# EAGLE board Meter_PCB_V1 (EAGLE 9.0.0)
REV: B
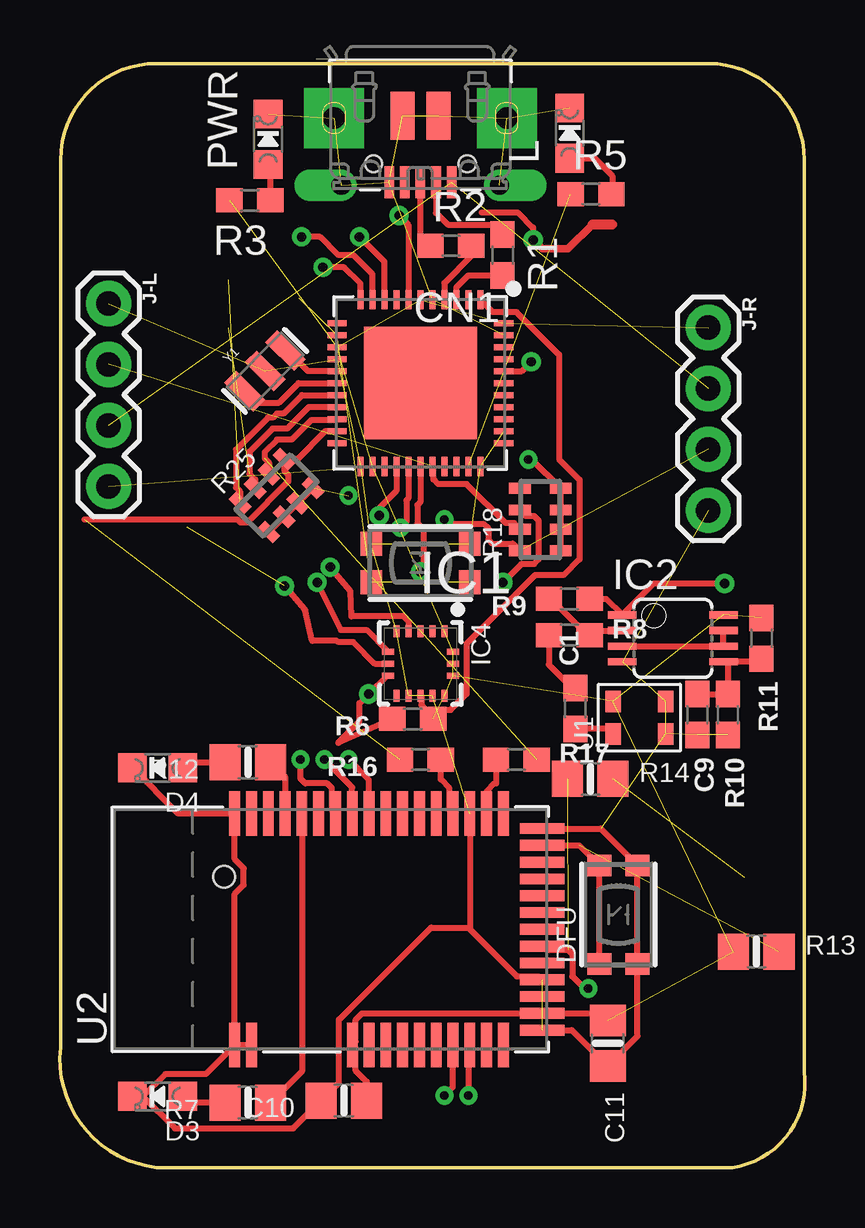
[diagram p0: board, top side]
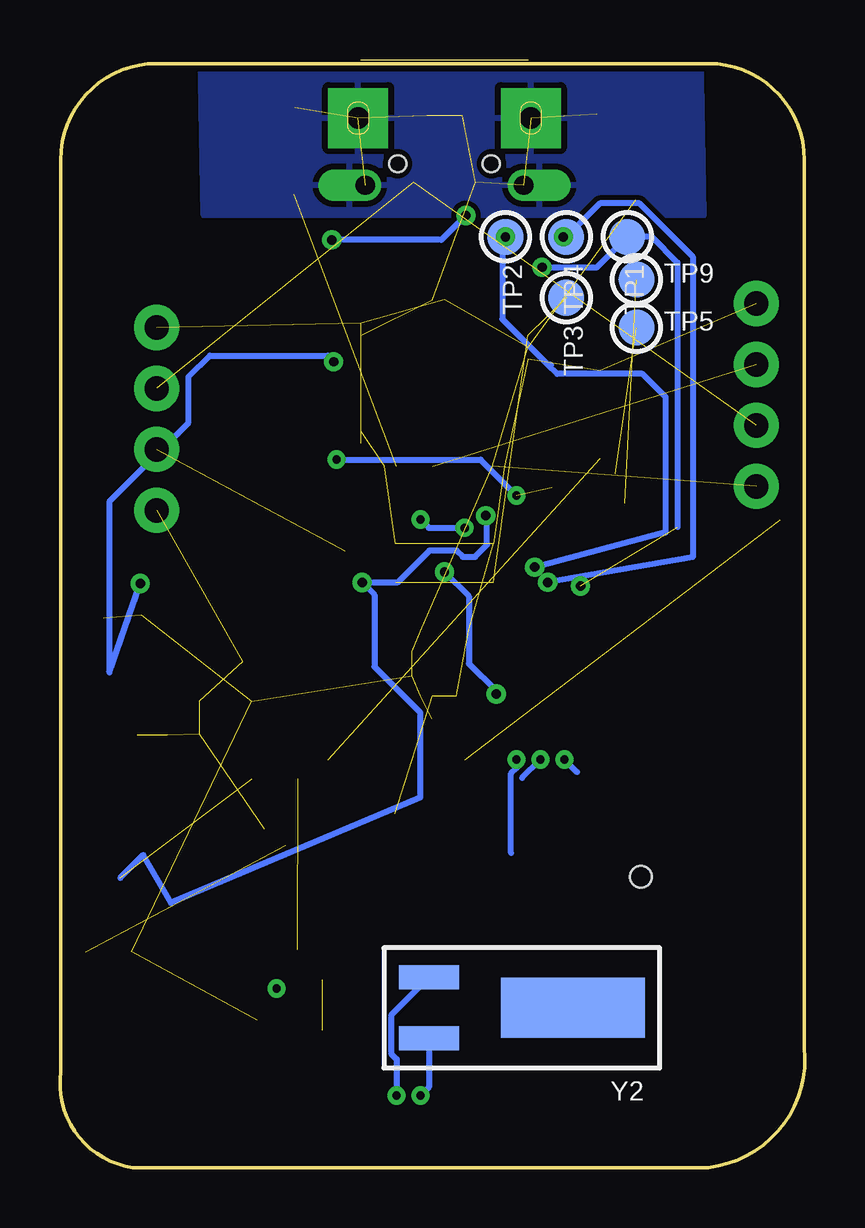
[diagram p1: board, bottom side, seen from below]

Size 31.06 x 46.15 mm. Coordinates in mm from the lower left corner, seen from the top.
Outline: 11.53,46.15 18.52,46.15
Outline: 0.03,5 0.03,42 arc-90 4.03,46 27.03,46 arc-90 31.03,42 31.03,4 arc-90 28.03,0 4.03,0 arc-90 0.03,5
Copper layers (1*16): Top 0.035mm / dielectric 1.5mm / Bottom 0.035mm
Design rules "adafruit *": minimum track width 8mil, minimum drill 15.5mil, track to track 8mil, track to pad 8mil, pad to pad 8mil, via to via 8mil, smd to smd 8mil, copper to edge 10mil, drill to drill 8mil, minimum pad ring 10mil, minimum via ring 8mil, stop-mask expansion 2mil, vias tented up to drill 20mil, thermal gap 10mil

## Footprints (pad centres in the part's own frame; a part is rotated, then mirrored left to right if it is on the bottom)
0603-NO = smd 1.1 x 1: 1 -0.85,0; 2 0.85,0
0805-NO = smd 1.3 x 1.5: 1 -0.95,0; 2 0.95,0
4UCONN_20329_V2 = smd 1 x 2: BASE@1 -0.75,-2; BASE@2 0.75,-2 | smd 0.4 x 1.35: D+ 0,0.775; D- -0.65,0.775; GND 1.3,0.775; ID 0.65,0.775; VBUS -1.3,0.775 | drill 0.8 pad 1.2 offset: SPRT@1 -3.3,0.9; SPRT@2 3.3,0.9 | drill 0.9 pad 2.5 square: SPRT@3 -3.6,-1.9; SPRT@4 3.6,-1.9 | hole 0.7: -1.95,0; 1.95,0
CHIPLED_0805_NOOUTLINE = smd 1.2 x 1.2: A 0,-1.05; C 0,1.05
BTN_KMR2_4.6X2.8 = smd 0.9 x 1: A 2.05,0.8; A' -2.05,0.8; B 2.05,-0.8; B' -2.05,-0.8
TQFN44_7MM = smd 0.25 x 0.8: 1 -2.5,-3.475; 2 -2,-3.475; 3 -1.5,-3.475; 4 -1,-3.475; 5 -0.5,-3.475; 6 0,-3.475; 7 0.5,-3.475; 8 1,-3.475; 9 1.5,-3.475; 10 2,-3.475; 11 2.5,-3.475; 23 2.5,3.475; 24 2,3.475; 25 1.5,3.475; 26 1,3.475; 27 0.5,3.475; 28 0,3.475; 29 -0.5,3.475; 30 -1,3.475; 31 -1.5,3.475; 32 -2,3.475; 33 -2.5,3.475 | smd 0.8 x 0.25: 12 3.475,-2.5; 13 3.475,-2; 14 3.475,-1.5; 15 3.475,-1; 16 3.475,-0.5; 17 3.475,0; 18 3.475,0.5; 19 3.475,1; 20 3.475,1.5; 21 3.475,2; 22 3.475,2.5; 34 -3.475,2.5; 35 -3.475,2; 36 -3.475,1.5; 37 -3.475,1; 38 -3.475,0.5; 39 -3.475,0; 40 -3.475,-0.5; 41 -3.475,-1; 42 -3.475,-1.5; 43 -3.475,-2; 44 -3.475,-2.5 | smd 4.7 x 4.7: THERMAL 0,0
MSOP08 = smd 0.3 x 1.2: 1 -0.976,-2.113; 2 -0.326,-2.113; 3 0.324,-2.113; 4 0.974,-2.113; 5 0.974,2.112; 6 0.324,2.112; 7 -0.326,2.112; 8 -0.976,2.112
LGA16_3X3MM = smd 0.5 x 0.25: 1 -1.35,1; 2 -1.35,0.5; 3 -1.35,0; 4 -1.35,-0.5; 5 -1.35,-1; 9 1.35,-1; 10 1.35,-0.5; 11 1.35,0; 12 1.35,0.5; 13 1.35,1 | smd 0.25 x 0.5: 6 -0.5,-1.35; 7 0,-1.35; 8 0.5,-1.35; 14 0.5,1.35; 15 0,1.35; 16 -0.5,1.35
1X01 = drill 1.016 pad 1.88: 1 0,0
1X04 = drill 1.016 pad 1.88: 1 0,0; 2 2.54,0; 3 5.08,0; 4 7.62,0
RESPACK_4X0603_NO = smd 0.45 x 0.9: 1 -1.3,-0.85; 2 -0.4,-0.85; 3 0.4,-0.85; 4 1.3,-0.85; 5 1.3,0.85; 6 0.4,0.85; 7 -0.4,0.85; 8 -1.3,0.85
TESTPOINT_ROUND_1.5MM = smd 1.5 x 1.5: P$1 0,0
SPW2430HR5H-B = smd 0.9 x 0.66: 1 -0.675,1.095; 2 -0.675,-1.095; 3 0.675,-1.095; 4 0.675,1.095
BLE_MODULE_RAYTAC_MDBT40 = smd 1.85 x 0.45: 1 -4.825,4; 2 -4.825,3.3; 3 -4.825,-0.9; 4 -4.825,-1.6; 5 -4.825,-2.3; 6 -4.825,-3; 7 -4.825,-3.7; 8 -4.825,-4.4; 9 -4.825,-5.1; 10 -4.825,-5.8; 11 -4.825,-6.5; 12 -4.825,-7.2; 26 4.825,-7.2; 27 4.825,-6.5; 28 4.825,-5.8; 29 4.825,-5.1; 30 4.825,-4.4; 31 4.825,-3.7; 32 4.825,-3; 33 4.825,-2.3; 34 4.825,-1.6; 35 4.825,-0.9; 36 4.825,-0.2; 37 4.825,0.5; 38 4.825,1.2; 39 4.825,1.9; 40 4.825,2.6; 41 4.825,3.3; 42 4.825,4 | smd 0.45 x 1.85: 13 -4.2,-8.825; 14 -3.5,-8.825; 15 -2.8,-8.825; 16 -2.1,-8.825; 17 -1.4,-8.825; 18 -0.7,-8.825; 19 0,-8.825; 20 0.7,-8.825; 21 1.4,-8.825; 22 2.1,-8.825; 23 2.8,-8.825; 24 3.5,-8.825; 25 4.2,-8.825 | hole 0.9: 2.2,4.45
RESONATOR-SMD = smd 0.7 x 1.7: 1 -1.2,0; 2 0,0; 3 1.2,0
CRYSTAL_CYL_2X6MM_SMT = smd 2.5 x 1: 1 2.125,1.27; 2 2.125,-1.27 | smd 6 x 2.5: CYLINDER -3.875,0

## Placement (x,y rotation side)
C1  0.1uF  [0603-NO]  21.49,19.13 90 top
C9  1uF  [0603-NO]  26.57,18.87 270 top
C10  1uF  [0805-NO]  11.84,2.79 180 top
C11  1uF  [0805-NO]  22.84,5.18 270 top
CN1  MicroB USB  [4UCONN_20329_V2]  15.03,41.83 180 top
D3  RED  [CHIPLED_0805_NOOUTLINE]  4.07,2.96 90 top
D4  BLUE  [CHIPLED_0805_NOOUTLINE]  4.07,16.65 90 top
DFU  KMR2  [BTN_KMR2_4.6X2.8]  23.28,10.54 90 top
IC1  ATMEGA32U4-MU  [TQFN44_7MM]  15.03,32.68 180 top
IC2  LMV358MM  [MSOP08]  25.55,22.05 270 top
IC4  LIS3DH  [LGA16_3X3MM]  15.03,21 270 top
J1  [1X01]  -20.97,-33 0 top  (outside the outline)
J-L  [1X04]  2.03,36 270 top
J-R  [1X04]  27.03,35 270 top
L  RED  [CHIPLED_0805_NOOUTLINE]  21.25,43.1 0 top
PWR  GREEN  [CHIPLED_0805_NOOUTLINE]  8.68,42.84 0 top
R1  22  [0603-NO]  18.46,38.02 270 top
R2  22  [0603-NO]  16.3,38.4 0 top
R3  1K  [0603-NO]  7.91,40.3 180 top
R5  1K  [0603-NO]  22.14,40.56 0 top
R6  10K  [0603-NO]  14.71,18.7 180 top
R7  2K  [0805-NO]  7.84,2.71 180 top
R8  1K  [0603-NO]  21.23,22.17 0 top
R9  100K  [0603-NO]  21.23,23.7 180 top
R10  10K  [0603-NO]  27.84,18.87 270 top
R11  20K  [0603-NO]  29.23,22.05 270 top
R12  2K  [0805-NO]  7.84,16.89 180 top
R13  10K  [0805-NO]  29.03,9 0 top
R14  2K  [0805-NO]  22.11,16.19 0 top
R16  0  [0603-NO]  15.03,17 180 top
R17  0  [0603-NO]  19.03,17 0 top
R18  1M  [RESPACK_4X0603_NO]  20.03,27 90 top
R25  1M  [RESPACK_4X0603_NO]  9.03,28 45 top
RESET  KMR2  [BTN_KMR2_4.6X2.8]  15.03,25.19 180 top
TP1  MISO  [TESTPOINT_ROUND_1.5MM]  7.41,38.78 270 bottom
TP2  SCK  [TESTPOINT_ROUND_1.5MM]  12.49,38.78 270 bottom
TP3  RST  [TESTPOINT_ROUND_1.5MM]  9.95,36.24 270 bottom
TP4  MOSI  [TESTPOINT_ROUND_1.5MM]  9.95,38.78 270 bottom
TP5  MISO  [TESTPOINT_ROUND_1.5MM]  7.03,35 0 bottom
TP9  MISO  [TESTPOINT_ROUND_1.5MM]  7.03,37 0 bottom
U1  SPW2430  [SPW2430HR5H-B]  24.15,18.75 90 top
U2  MBT40  [BLE_MODULE_RAYTAC_MDBT40]  11.28,9.92 90 top
U$34  [CPLAYFRONT]  -10.37,-4.4 0 top  (outside the outline)
Y1  8MHz  [RESONATOR-SMD]  8.55,33.19 45 top
Y2  32.768kHz (535-9166-2-ND)  [CRYSTAL_CYL_2X6MM_SMT]  13.55,6.65 180 bottom

## Library data of the parts
C1 C9-C11 CN1 D3 D4 DFU IC1 IC4 L PWR R1-R3 R5-R14 R16-R18 R25 RESET TP1-TP5 TP9 U1 U2 U$34 Y2 = microbuilder
IC2 = linear
J1 = SparkFun-Connectors
J-L J-R = SparkFun-Connectors; PROD_ID: CONN-09696
Y1 = SparkFun

## Nets
3.3V: C10.1 C11.1 IC1.6 IC1.14 IC1.24 IC1.34 IC1.44 IC2.8 IC4.1 IC4.13 IC4.14 IC4.15 IC4.16 J-L.4 J-R.1 R3.2 R6.1 R11.1 R13.1 U1.4 U2.3 U2.14
A4_SOUND_SENSE: IC1.40 IC2.1 R9.1
AREF: IC1.42
CONN_LED: R12.1 U2.39
D0/RX: IC1.20 R17.2 R25.6
D1/TX: IC1.21 R16.2 R25.5
D2_SDA: IC1.19 R25.7 TP5.P$1
D3_SCL: IC1.18 R25.8 TP9.P$1
D6: IC1.27 J-R.3 R18.8
D7_LISINT: IC1.1 IC4.11
D8: IC1.28 IC4.8 R6.2
D9: IC1.29 J-L.2 R18.7
D10: R18.5
D12: IC1.26 R14.2 R18.6
D13: IC1.32 R5.1
D+: CN1.D+ R2.1
D-: CN1.D- R1.1
DCC: U2.15
DEC2: U2.41
DFU: DFU.A DFU.A' R13.2 U2.24
FCTRYRST_3V: U2.34
GND: C9.2 C10.2 C11.2 CN1.BASE@1 CN1.BASE@2 CN1.GND CN1.SPRT@1 CN1.SPRT@2 CN1.SPRT@3 CN1.SPRT@4 D3.C D4.C DFU.B DFU.B' IC1.5 IC1.15 IC1.23 IC1.33 IC1.35 IC1.43 IC2.4 IC4.5 IC4.10 IC4.12 J-L.1 J-R.4 L.C PWR.C R10.2 RESET.B RESET.B' U1.2 U1.3 U2.1 U2.2 U2.13 U2.16 U2.25 U2.28 U2.42 Y1.2
MISO: IC1.11 IC4.7 TP1.P$1
MODE: R14.1 U2.18
MODE_LED: R7.1 U2.38
MOSI: IC1.10 IC4.6 TP4.P$1
N$1: PWR.A R3.1
N$2: IC2.2 R8.2 R9.2
N$3: IC1.3 R1.2
N$4: IC1.4 R2.2
N$5: D3.A R7.2
N$6: C9.1 IC2.5 R10.1 R11.2
N$8: IC1.17 Y1.1
N$9: IC1.16 Y1.3
N$10: L.A R5.2
N$11: D4.A R12.2
N$12: U2.9 Y2.1
N$13: U2.10 Y2.2
N$15: C1.2 R8.1
RST: IC1.13 RESET.A RESET.A' TP3.P$1
RXI: R16.1 U2.29
SCK: IC1.9 IC4.4 TP2.P$1
SOUNDOUT: C1.1 U1.1
SWCLK: U2.36
SWDIO/RST_3V: U2.35
TXLED1: R18.1 R18.2 R18.3 R18.4 R25.1 R25.2 R25.3 R25.4
TXO: R17.1 U2.27
VBAT: CN1.VBUS J-L.3 J-R.2
VBUS: IC1.7
VCC/2: IC2.3 IC2.6 IC2.7

## Tracks (layer width: path | path; a pad name or v marks a point on that pad's centre or on a via)
3.3V  (18 unrouted)
  Top 0.254: C10.1 12.79,3.58 12.33,4.04 12.33,4.95 U2.3 12.33,5.24 12.33,6.16 12.59,6.42 U2.14 22.54,6.42 C11.1
A4_SOUND_SENSE  (via drill 0.39)
  Top 0.254: IC1.40 19.26,33.18 v19.65,33.57 | IC2.1 23.01,23.02 | v27.71,24.33 24.75,24.33 IC2.1 | R9.1 22.76,23.7 IC2.1
  Bottom 0.254: v27.71,24.33 29,20.62 29,27.73 25.69,31.03 25.69,32.94 24.81,33.83 19.9,33.83 v19.65,33.57
CONN_LED
  Top 0.254: R12.1 9.38,16.29 U2.39
D0/RX  (1 unrouted)
  Top 0.254: IC1.20 11.51,31.14 10.48,31.14 9.66,30.33 9.05,30.33 8.54,29.82 8.54,29.54 8.71,29.37 R25.6
D1/TX  (1 unrouted)
  Top 0.254: IC1.21 11.06,30.68 9.9,29.52 R25.5 9.34,29.03 9.52,28.86 9.52,28.59 7.8,26.87 7.53,26.87 7.4,27 1.03,27
D2_SDA  (1 unrouted)
  Top 0.254: IC1.19 10.37,31.68 9.47,30.79 8.86,30.79 7.9,29.83 7.9,28.91 8.14,28.66 R25.7
D3_SCL  (1 unrouted)
  Top 0.254: IC1.18 10.09,32.18 9.32,31.41 9.04,31.41 8.88,31.24 8.67,31.24 7.34,29.91 7.34,28.34 7.51,28.17 R25.8
D6  (via drill 0.35)  (1 unrouted)
  Top 0.254: IC1.27 14.53,27.88 14.44,27.79 14.44,26.9 v14.19,26.65 | v16.03,27 16.21,26.82 17.66,26.82 17.86,26.63 17.86,26.17 18.03,26 18.88,26 R18.8
  Bottom 0.254: v16.03,27 15.68,26.65 v14.19,26.65
D7_LISINT
  Top 0.254: IC1.1 18.05,35.64 19.04,35.64 20.81,33.87 20.81,29.51 21.66,28.66 21.66,25.34 21.01,24.69 19.81,24.69 16.96,21.83 16.96,19.74 16.29,19.07 15.26,19.07 15.07,19.26 15.07,19.61 IC4.11
D8  (via drill 0.39)
  Top 0.254: IC1.28 15.03,27.73 14.9,27.6 14.9,26.84 15.15,26.59 15.15,24.94 v15.03,24.81 | R6.2 11.6,17.7 12.49,18.59 12.49,19.35 v12.87,19.73 13.64,20.5 IC4.8
  Bottom 0.254: v15.03,24.81 14.01,23.79 14.01,21 12.87,19.86 v12.87,19.73
D9  (1 unrouted)
  Top 0.254: R18.7 18.93,26.84 18.59,26.84 16.96,28.48 15.76,28.48 15.57,28.67 15.57,29.16 IC1.29
D12  (via drill 0.39)  (1 unrouted)
  Top 0.254: IC1.26 14.03,28.19 13.31,27.48 v13.31,27.16 | R18.6 19.42,27.16 19.76,27.16 19.96,26.96 19.96,25.34 19.76,25.14 19.24,25.14 v18.46,24.37
  Bottom 0.254: 28.55,12.07 27.58,13.03 26.42,11.03 16.04,15.41 16.04,18.97 17.95,20.87 17.95,23.86 v18.46,24.37 16.99,24.37 15.66,25.7 14.52,25.7 14.26,25.45 13.76,25.45 13.25,25.95 13.25,27.1 v13.31,27.16
D13  (1 unrouted)
D+
  Top 0.254: R2.1 15.03,38.82 CN1.D+
D-
  Top 0.254: CN1.D- 15.68,39.78 16.17,39.29 18.04,39.29 R1.1
DFU  (1 unrouted)
  Top 0.254: U2.24 21.65,13.42 DFU.A DFU.A'
FCTRYRST_3V  (via drill 0.35)
  Top 0.254: U2.34 12.88,16.14 v12.03,17
  Bottom 0.254: 12.25,13.11 12.25,16.43 12.03,16.65 v12.03,17
GND  (29 unrouted)
  Top 0.254: D4.C 4.93,14.75 U2.42 7.28,12.85 7.66,12.47 7.66,11.78 7.28,11.4 U2.1 | U2.1 6.08,3.89 4.39,3.89 3.46,2.96 | U2.2 U2.1 | U2.16 19.96,7.97 19.05,7.97 17.08,9.93 17.08,10 | U2.28 17.08,10 | U2.13 21.34,5.72 C11.2 24.08,5.47 DFU.B' DFU.B 22.55,14.12 U2.25 | D3.C 3.46,2.96 | 3.46,2.96 4.79,1.63 9.72,1.63 C10.2 11.63,3.53 11.63,6.16 15.47,10 17.08,10
  pour Bottom: 4.36,46.4 4.23,39.67 25.06,39.67 25.19,46.4
MISO  (via drill 0.39)  (1 unrouted)
  Top 0.254: IC1.11 12.53,36.84 11.85,37.51 v10.96,37.51 | IC4.7 13.12,21 12.23,21.89 11.6,21.89 11.55,21.94 10.52,21.94 10.23,23.23 v9.36,24.23
  Bottom 0.254: v10.96,37.51 8.68,37.51 TP1.P$1 6.39,38.78 5.31,37.7 5.31,26.68
MODE  (via drill 0.35)  (1 unrouted)
  Top 0.254: v22.03,7.46 21.87,7.46 21.36,7.97 21.36,8.88 21.17,9.08 20.25,9.08 U2.18
MODE_LED
  Top 0.254: U2.38 10.08,4.01 R7.1
MOSI  (via drill 0.39)
  Top 0.254: IC1.10 13.03,37.22 12.23,38.02 11.6,38.02 10.84,38.78 v10.07,38.78 | IC4.6 12.78,22.4 11.71,22.4 v10.72,24.38
  Bottom 0.254: v10.07,38.78 TP4.P$1 8.55,40.18 6.9,40.18 4.68,37.95 4.68,25.43 v10.72,24.38
N$1
  Top 0.254: PWR.A arc-90 8.76,41.71 R3.1
N$2
  Top 0.254: IC2.2 22.28,22.37 R8.2 21.96,22.3 21.87,22.3 20.47,23.7 R9.2
N$3
  Top 0.254: IC1.3 16.53,36.67 17.02,37.17 R1.2
N$4
  Top 0.254: R2.2 17.19,38.4 17.19,38.01 16.03,36.85 IC1.4
N$5
  Top 0.254: R7.2 5.38,2.71 D3.A
N$6
  Top 0.254: C9.1 R10.1 27.84,21.07 IC2.5 29.11,21.07 R11.2
N$8
  Top 0.254: IC1.17 9.95,32.68 9.13,31.87 8.23,31.87 7.75,32.34 Y1.1
N$9
  Top 0.254: IC1.16 11.54,33.19 10.33,33.19 9.48,34.04 Y1.3
N$10
  Top 0.254: L.A 22.3,42.05 23.03,41.32 23.03,40.6 R5.2
N$11
  Top 0.254: D4.A 5.36,16.89 R12.2
N$12  (via drill 0.35)
  Top 0.254: v16.03,3 16.38,3.36 U2.9
  Bottom 0.254: Y2.1 15.67,3.35 v16.03,3
N$13  (via drill 0.35)
  Top 0.254: U2.10 17.03,5.04 v17.03,3
  Bottom 0.254: v17.03,3 17.03,4.51 17.26,4.74 17.26,6.34 Y2.2
N$15
  Top 0.254: R8.1 20.38,20.95 21.36,19.98 C1.2
RST  (3 unrouted)
RXI
  Top 0.254: U2.29 16.24,14.89 16.24,15.81 15.88,16.17 R16.1
SCK  (via drill 0.39)
  Top 0.254: IC1.9 13.53,37.74 TP2.P$1 | IC4.4 14.53,22.77 14.33,22.97 12.15,22.97 12.11,24.02 v11.26,25.02
  Bottom 0.254: 12.87,38.4 12.61,38.65 | 12.61,38.65 TP2.P$1 | 12.61,38.65 12.61,35.35 10.71,33.45 | 10.58,33.45 10.71,33.45 | 10.71,33.45 10.33,33.06 6.77,33.06 5.82,32.11 5.82,26.46 v11.26,25.02
  other vias: 12.49,38.78
SOUNDOUT
  Top 0.254: U1.1 22.85,18.28 C1.1
SWCLK  (via drill 0.35)
  Top 0.254: v10.03,17 10.03,16.2 10.23,16 11.15,16 11.34,15.81 11.34,14.89 U2.36
  Bottom 0.254: 9.5,16.48 v10.03,17
SWDIO/RST_3V  (via drill 0.35)
  Top 0.254: U2.35 12.18,15.84 v11.03,17
  Bottom 0.254: 11.79,16.24 v11.03,17
TXLED1  (via drill 0.35)  (1 unrouted)
  Top 0.254: R25.1 R25.2 R25.3 R25.4 | R18.1 R18.2 R18.3 R18.4 19.68,29.5 v19.53,29.5
  Bottom 0.254: v19.53,29.5 13.53,29.5 v12.03,28
TXO
  Top 0.254: R17.1 18.18,16 18.12,16 17.78,15.66 U2.27
VBAT  (2 unrouted)
VBUS  (via drill 0.39)
  Top 0.254: v14.14,39.67 14.53,39.28 IC1.7 | 17.58,39.8 19.09,39.8 19.73,39.16 v19.73,38.65
  Top 0.305: 22.2,39.29 21.19,38.27 20.11,38.27 v19.73,38.65
  Top 0.406: 23.03,39.29 22.2,39.29
  Bottom 0.254: v14.14,39.67 15.15,38.65 v19.73,38.65
VCC/2
  Top 0.254: IC2.3 IC2.6 IC2.7